# Altium PCB FT232RTPCB.PcbDoc
Units mm, origin at the board's own origin, x right, y up, seen from the top; angles counter-clockwise.
Board outline 26.04 x 16 mm, 2 copper layers (Top Layer, Bottom Layer); 11 components, 14 nets, 59 pads, 14 vias.
Unrouted connection lines stored in the file: 2.
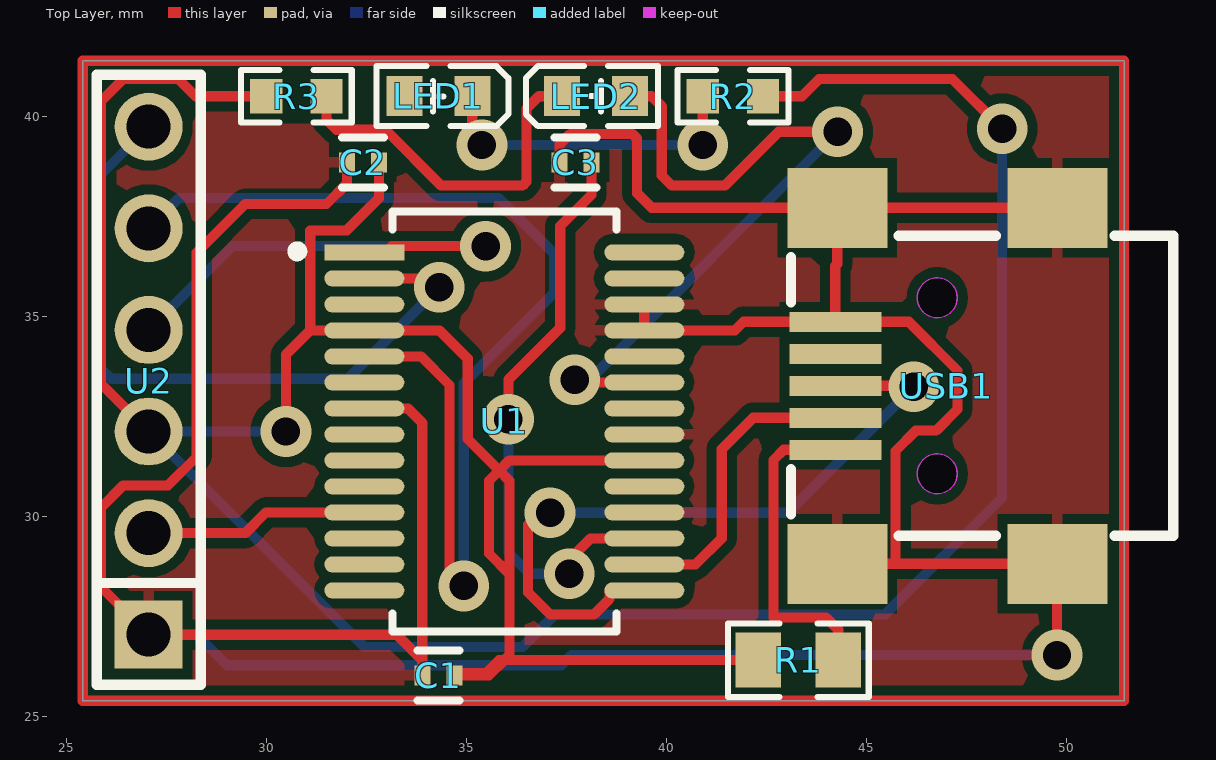
[diagram p0: Top Layer view]
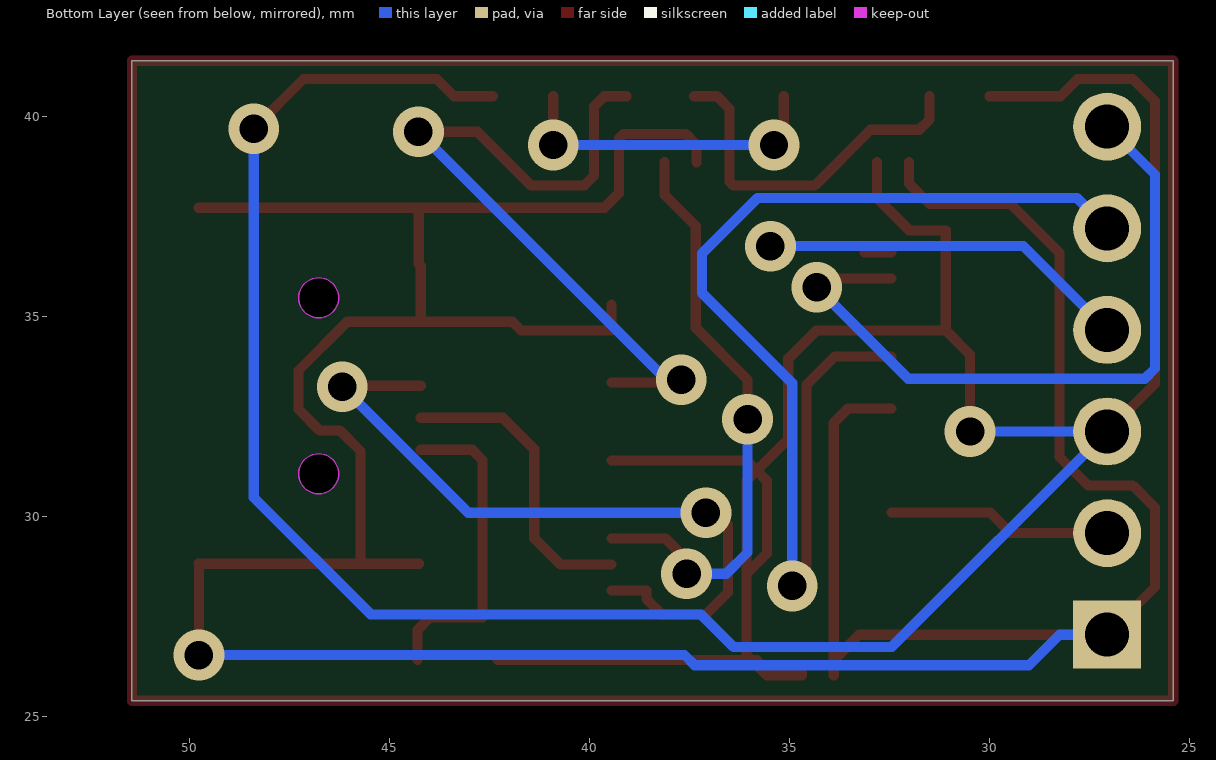
[diagram p1: Bottom Layer view, seen from below]

## Layer stack, top to bottom
Top Solder: solder mask 0.0102, Solder Resist, Dk 3.5
Top Layer: signal copper 0.0356
Dielectric 1: dielectric 0.32, FR-4, Dk 4.8
Bottom Layer: signal copper 0.0356
Bottom Solder: solder mask 0.0102, Solder Resist, Dk 3.5

## Board outline
25.4,25.4 25.4,41.402 51.435,41.402 51.435,25.4

## Design rules (kind name [scope] priority, off if disabled: settings)
Clearance [All] p1: gap=0.254 ignorepadtopadclearanceinfootprint=FALSE except(0.2: Arc-Arc Arc-Track Arc-SMDPad Arc-THPad Track-Track Track-SMDPad Track-THPad SMDPad-SMDPad SMDPad-THPad THPad-THPad)
PolygonConnect [All] p1: connectstyle=Relief reliefconductorwidth=0.254 reliefentries=4 polygonreliefangle="90 Angle" airgapwidth=0.254
RoutingVias [All] p1: holewidth=0.711 width=1.27 viastyle="Through Hole" minholewidth=0.711 minwidth=1.27 maxholewidth=0.711 maxwidth=1.27
SolderMaskExpansion [All] p1: expansion=0.102 istentingtop=FALSE
SupplyNets "Schematic Supply Nets" [InNet('GND')] p1: voltage=0.000
Width [All] p1: maxlimit=0.254 minlimit=0.254 preferedwidth=0.254
30 further rules are at their usual default settings.

## Components (designator, comment, footprint, x,y, rotation, side; value= is the part's Value field where it differs from the comment)
C1 "10uF" FP-GRM15-MFG 34.29,26.035 r0 top value=0.10μF
C2 "0.1uF" FP-GRM15-MFG 32.404,38.862 r0 top value=0.10μF
C3 "0.1uF" FP-GRM15-MFG 37.719,38.862 r0 top value=0.10μF
LED1 "YLED0603R" LED0603-FD 34.29,40.513 r0 top
LED2 "YLED0603R" LED0603-FD 38.227,40.513 r180 top
R1 "0kΩ" R0805 43.291,26.416 r0 top value=10kΩ
R2 "1kΩ" R0603 41.656,40.513 r0 top
R3 "1kΩ" R0603 30.743,40.513 r180 top
U1 "FT232RL-REEL" FP-SSOP-28-MFG 35.941,32.385 r0 top
U2 "HB-PH3-25416PB2GOP" HDR-TH_6P-P2.54-V-M 27.051,33.401 r90 top
USB1 "KH-MINI-SMT-5P-Cu" MINI-USB-SMD_KH-MINI-SMT-5P-CU 46.99,33.274 r90 top

## Footprints (in the part's own frame and the unit in brackets; to place one, negate y for a bottom-side part, rotate by r counter-clockwise, add the part's x,y. Pads: shape width x height; smd on the part's side, far side on the other; paste and mask are expansions set on the pad)
FP-GRM15-MFG [mm]
  rect 0.4x0.5 smd paste+0 mask+0: 1(-0.4,0) 2(0.4,0)
  silkscreen extent -0.53,-0.62 0.53,0.62, body extent -0.7,-0.38 0.7,0.38, height 0.25
FP-SSOP-28-MFG [mm]
  rect 2x0.4 smd paste+0 mask+0: 1(-3.5,4.225)
  rrect100% 2x0.4 smd paste+0 mask+0: 2(-3.5,3.575) 3(-3.5,2.925) 4(-3.5,2.275) 5(-3.5,1.625) 6(-3.5,0.975) 7(-3.5,0.325) 8(-3.5,-0.325) 9(-3.5,-0.975) 10(-3.5,-1.625) 11(-3.5,-2.275) 12(-3.5,-2.925) 13(-3.5,-3.575) 14(-3.5,-4.225) 15(3.5,-4.225) 16(3.5,-3.575) 17(3.5,-2.925) 18(3.5,-2.275) 19(3.5,-1.625) 20(3.5,-0.975) 21(3.5,-0.325) 22(3.5,0.325) 23(3.5,0.975) 24(3.5,1.625) 25(3.5,2.275) 26(3.5,2.925) 27(3.5,3.575) 28(3.5,4.225)
  silkscreen extent -5.3,-5.25 2.8,5.25, body extent -4.6,-5.55 4.6,5.55, height 0.25
HDR-TH_6P-P2.54-V-M [mm]
  rect 1.7x1.7 hole 1.1: 1(-6.35,0)
  round 1.7 hole 1.1: 2(-3.81,0) 3(-1.27,0) 4(1.27,0) 5(3.81,0) 6(6.35,0)
  silkscreen extent -7.6,-1.3 7.65,1.3
LED0603-FD [mm]
  rect 0.9x1 smd: 1(-0.85,0) 2(0.85,0)
  silkscreen extent -1.55,-0.75 1.75,0.75
MINI-USB-SMD_KH-MINI-SMT-5P-CU [mm]
  rect 0.5x2.3 smd paste+0 mask+0.05: 1(-1.6,2.775) 2(-0.8,2.775) 3(0,2.775) 4(0.8,2.775) 5(1.6,2.775)
  rect 2x2.5 smd paste+0 mask+0.05: 6(-4.45,-2.775) 7(-4.45,2.725) 8(4.45,-2.775) 9(4.45,2.725)
  Keep-Out Layer board cut-out: -1.7,0.225 -1.749,0.008 -1.888,-0.166 -2.089,-0.263 -2.311,-0.263 -2.512,-0.166 -2.65,0.008 -2.7,0.225 -2.7,0.225 -2.65,0.442 -2.512,0.616 -2.311,0.712 -2.089,0.712 -1.888,0.616 -1.749,0.442 -1.7,0.225
  Keep-Out Layer board cut-out: 2.7,0.225 2.65,0.008 2.512,-0.166 2.311,-0.263 2.089,-0.263 1.888,-0.166 1.749,0.008 1.7,0.225 1.7,0.225 1.749,0.442 1.888,0.616 2.089,0.712 2.311,0.712 2.512,0.616 2.65,0.442 2.7,0.225
  Keep-Out Layer circle w0.025: c-2.2,0.225 r0.5
  Keep-Out Layer circle w0.025: c2.2,0.225 r0.5
  Keep-Out Layer region: -1.7,0.225 -1.749,0.008 -1.888,-0.166 -2.089,-0.263 -2.311,-0.263 -2.512,-0.166 -2.65,0.008 -2.7,0.225 -2.7,0.225 -2.65,0.442 -2.512,0.616 -2.311,0.712 -2.089,0.712 -1.888,0.616 -1.749,0.442 -1.7,0.225
  Keep-Out Layer region: 2.7,0.225 2.65,0.008 2.512,-0.166 2.311,-0.263 2.089,-0.263 1.888,-0.166 1.749,0.008 1.7,0.225 1.7,0.225 1.749,0.442 1.888,0.616 2.089,0.712 2.311,0.712 2.512,0.616 2.65,0.442 2.7,0.225
  silkscreen extent -3.75,-5.67 3.75,3.89
R0603 [mm]
  rect 0.806x0.864 smd paste-100 mask+0.051: 1(-0.753,0) 2(0.753,0)
  silkscreen extent -1.39,-0.66 1.39,0.66
R0805 [mm]
  rect 1.133x1.377 smd paste-100 mask+0.051: 1(-1,0) 2(1,0)
  silkscreen extent -1.76,-0.92 1.76,0.92

## Part data
C1 C2 C3: library part CMP-2100-03641-2, "CAP CER 0.1UF 16V X7R 0402", Capacitance=0.10μF, Manufacturer=Murata, Manufacturer Part Number=GRM155R71C104KA88D, Package=GRM15, Temperature="-55°C to +125°C", Temperature Characteristic=X7R, Temperature Range High=+125°C, Temperature Range Low=-55°C, Tolerance=10%, Voltage Rating=16Vdc, Category=Cap, ComponentLink2Description=Datasheet, ComponentLink2URL=https://search.murata.co.jp/Ceramy/image/img/A01X/G101/ENG/GRM155R71H471KA01-01A.pdf, Device Class L1="Passive Components", Device Class L2=Capacitors, Device Class L3="Ceramic Capacitors", Digikey Description="CAP CER 0.1UF 16V X7R 0402", Height=0.55mm, Ipc Land Pattern Name=CAPC10050X219, Lead Free=yes, Material=Ceramic, Mouser Description="0402 0.1 uF 16V ±10 % Tolerance X7R SMT Multilayer Ceramic Capacitor", Octopart=https://octopart.com/grm155r71c104ka88d-murata-196880, RoHS=TRUE, Standoff Height=0mm
LED1 LED2: Color Temperature=-, Emitted Color=Red, Forward Current=25mA, Forward Voltage (VF)=1.8V~2.4V, JLCPCB Part Class="Extended Part", Manufacturer=YONGYUTAI(永裕泰), Operating Temperature=-40℃~+85℃, Add into BOM=yes, Convert to PCB=yes, Datasheet=https://atta.szlcsc.com/upload/public/pdf/source/20231027/FB19AF06E2C70028E58AB5CEDD1BDC72.pdf, Device=YLED0603R, Diode Configuration=-, Dominant Wavelength=620nm~625nm, LCSC Part Name=YLED0603R, Lens Color=-, Luminous Intensity=-, Manufacturer Part=YLED0603R, Mounting Sytle=-, Peak Wavelength=-, Power Dissipation=-, Supplier=LCSC, Supplier Footprint=0603, Supplier Part=C19171390, Symbol=YLED0603R, Viewing Angle=-
R1: library part RC0805FR-0710KL, JLCPCB Part Class="Extended Part", LCSC Part Name="厚膜电阻 10kΩ ±1% 125mW", Manufacturer=YAGEO(国巨), Operating Temperature Range=-55℃~+155℃, Temperature Coefficient=±100ppm/℃, Tolerance=±1%, Add into BOM=yes, Convert to PCB=yes, Datasheet=https://atta.szlcsc.com/upload/public/pdf/source/20170708/1499509500945.pdf, Device=RC0805FR-0710KL, Manufacturer Part=RC0805FR-0710KL, Supplier=LCSC, Supplier Footprint=0805, Supplier Part=C84376, Symbol=RC0805FR-0710KL, Type="Thick Film Resistors"
R2 R3: JLCPCB Part Class="Extended Part", Manufacturer=YAGEO(国巨), Manufacturer Part=RC0603FR-071KL, nameAlias=Value, spicePre=R, spiceSymbolName=RC0603FR-071KL, Supplier=LCSC, Supplier Part=C22548
U1: library part CMP-0078-00029-4, "IC USB FS SERIAL UART 28-SSOP", Case/Package=SSOP, Max Operating Temperature=85°C, Max Supply Voltage=5.25V, Min Operating Temperature=-40°C, Min Supply Voltage=3.3V, Operating Supply Current=15mA, Package Quantity=2000, Voltage=5V, Data Rate=12Mbps, Height=1.75mm, Interface=UART, Lead Free="Lead Free", Length=10.2mm, Mount="Surface Mount", Number of Channels=1, Number of Pins=28, Number of Transceivers=1, Packaging="Tape and Reel", Radiation Hardening=No, REACH SVHC="No SVHC", Weight=0.080001oz, Width=5.3mm
U2: Color=Black, Current Rating=3A, JLCPCB Part Class="Extended Part", LCSC Part Name="1x6P 间距:2.54mm 方针 直插", Manufacturer=HANBO(汉博), Operating Temperature=-40℃~+105℃, Voltage Rating (Max)=250V, Add into BOM=yes, Circluar Pins/Square Pins=Policy, Contact Material=Brass, Contact Plating=Gold, Convert to PCB=yes, Datasheet=https://atta.szlcsc.com/upload/public/pdf/source/20230803/F72D259687963761DF1B552F3BB84A31.pdf, Device=HB-PH3-25416PB2GOP, Insulation Height=2.54mm, Length of End Connection Pin=3mm, Length of Mating Pin=6mm, Manufacturer Part=HB-PH3-25416PB2GOP, Mounting Type=Straight, Number of Pins=6P, Number of Rows="Single Row", Pin Structure=1x6P, Pitch=2.54mm, Row Spacing=2.54mm, Supplier=LCSC, Supplier Footprint=插件,P=2.54mm, Supplier Part=C6332199, Symbol=HB-PH3-25416PB2GOP
USB1: Current Rating - Power (Max)=1A, JLCPCB Part Class="Extended Part", LCSC Part Name="Mini-B 母 卧贴", Manufacturer=kinghelm(金航标), Operating Temperature Range=-, Add into BOM=yes, Connector Type=Mini-B, Contact Material=-, Contact Plating=-, Convert to PCB=yes, Datasheet=https://atta.szlcsc.com/upload/public/pdf/source/20210202/C2688795_BF0BB16DAD2ABFC9845DEEA6AC1A1F9C.pdf, Device=KH-MINI-SMT-5P-Cu, Gender=Female, Manufacturer Part=KH-MINI-SMT-5P-Cu, Mounting Style=卧贴, Number of Contacts=5P, Number of Ports=1, Soldering Temperature(Max)=-, Standard="USB 2.0", Supplier=LCSC, Supplier Footprint=SMD, Supplier Part=C2688795, Symbol=KH-MINI-SMT-5P-CU

## Via types
v1: diameter 1.27, hole 0.711, Top Layer to Bottom Layer, 14 vias

## Nets (pads, with @x,y where several pads share a name; then routed paths per layer and width w, separated by ;. In a path a pad name is that pad's centre, name@x,y a point inside that pad or via, vN(x,y) a via of type N, cw(c..) or ccw(c..) an arc to the next point about the centre after c; other vN are vias at no path point)
GND: C1.1 C2.1 C3.1 U1.7 U1.18 U1.21 U1.25 U1.26 U2.1 USB1.5 USB1.6 USB1.7 USB1.8 USB1.9 | length 94.9
  Top Layer w0.254: C2.1 32.004,38.329 31.496,37.821 29.464,37.821 28.245,36.601 28.245,31.496 27.534,30.785 26.416,30.785 25.857,30.226 25.857,28.245 U2.1 33.255,27.051 33.89,26.416 ; U1.7 33.528,32.71 33.89,32.348 33.89,26.416 ; C1.1 33.89,26.416 ; C3.1 37.319,39.3 37.592,39.573 39.141,39.573 39.26,39.454 39.26,38.088 39.624,37.724 USB1.9 ; U1.26 U1.25 41.707,34.66 41.921,34.874 USB1.5 ; USB1.7 45.72,28.824 ; v1(49.759,26.543) USB1.6@49.759,28.824 ; USB1.6 USB1.6@49.759,28.824 ; USB1.8 USB1.9 ; USB1.5 46.05,34.874 47.269,33.655 47.269,32.687 46.736,32.153 46.228,32.153 45.72,31.645 45.72,28.824 ; USB1.5 44.215,36.271 44.265,36.321 USB1.9 ; 45.72,28.824 USB1.6@49.759,28.824
  Bottom Layer w0.254: U2.1 28.245,27.051 29.007,26.289 37.363,26.289 37.617,26.543 v1(49.759,26.543)
NetC1_2: C1.2 C2.2 R1.1 R2.2 R3.2 U1.4 U1.20 U2.3 | length 94
  Top Layer w0.254: U2.3 25.857,33.325 25.857,40.386 26.416,40.945 27.788,40.945 28.219,40.513 R3.2 ; v1(30.48,32.131) 30.48,34.05 31.09,34.66 ; C2.2 32.804,37.96 32.004,37.16 31.09,37.16 31.09,34.66 ; U1.20 36.068,31.41 35.814,31.156 ; R1.1 35.941,26.416 ; R2.2 43.383,40.513 43.815,40.945 47.142,40.945 v1(48.387,39.7) ; 31.09,34.66 U1.4 34.315,34.66 35.027,33.949 35.027,31.943 35.814,31.156 ; 35.814,31.156 35.56,30.902 35.56,29.083 36.068,28.575 ; 35.814,31.156 36.068,30.902 36.068,28.575 ; 35.941,26.416 35.814,26.416 35.484,26.086 34.69,26.086 C1.2 35.56,26.035 35.941,26.416 ; 35.941,26.416 36.068,26.543 36.068,28.575
  Bottom Layer w0.254: v1(30.48,32.131) U2.3 32.436,26.746 36.398,26.746 37.211,27.559 45.466,27.559 48.387,30.48 v1(48.387,39.7)
NetC3_2: C3.2 U1.17 | length 14.8
  Top Layer w0.254: v1(36.043,32.436) 36.043,33.426 37.338,34.722 37.338,37.268 38.119,38.049 C3.2 ; v1(37.567,28.575) 37.567,28.927 38.1,29.46 U1.17
  Bottom Layer w0.254: v1(36.043,32.436) 36.043,29.108 36.576,28.575 v1(37.567,28.575)
NetLED1_1: LED1.1 U1.22
NetLED1_2: LED1.2 R2.1 | length 8.1
  Top Layer w0.254: LED1.2 35.14,39.536 v1(35.382,39.294) ; v1(40.903,39.294) R2.1
  Bottom Layer w0.254: v1(35.382,39.294) v1(40.903,39.294)
NetLED2_1: LED2.1 U1.23 | length 18.6
  Top Layer w0.254: v1(37.699,33.426) 37.766,33.36 U1.23 ; LED2.1 39.624,40.513 39.878,40.259 39.878,38.532 40.132,38.278 41.453,38.278 42.799,39.624 v1(44.272,39.624)
  Bottom Layer w0.254: v1(37.699,33.426) 38.075,33.426 v1(44.272,39.624)
NetLED2_2: LED2.2 R3.1 | length 9.1
  Top Layer w0.254: R3.1 31.496,39.929 31.75,39.675 32.969,39.675 34.366,38.278 36.398,38.278 36.493,38.372 36.493,40.201 36.805,40.513 LED2.2
NetR1_2: R1.2 USB1.1 | length 8.1
  Top Layer w0.254: USB1.1 42.926,31.674 42.672,31.42 42.672,27.483 43.986,27.483 44.291,27.178 R1.2
NetU1_1: U1.1 U2.4 | length 12.5
  Top Layer w0.254: U1.1 33.122,36.61 33.122,36.765 v1(35.473,36.765)
  Bottom Layer w0.254: U2.4 29.145,36.765 v1(35.473,36.765)
NetU1_2: U1.2 U2.6 | length 18
  Top Layer w0.254: U1.2 34.093,35.96 v1(34.315,35.738)
  Bottom Layer w0.254: U2.6 25.857,38.557 25.857,33.706 26.111,33.452 32.029,33.452 v1(34.315,35.738)
NetU1_5: U1.5 U2.5 | length 27.9
  Top Layer w0.254: U1.5 33.858,34.01 34.573,33.296 34.573,28.623 v1(34.925,28.27)
  Bottom Layer w0.254: U2.5 27.813,37.973 35.789,37.973 37.186,36.576 37.186,35.601 34.925,33.34 v1(34.925,28.27)
NetU1_11: U1.11 U2.2 | length 5.6
  Top Layer w0.254: U2.2 29.464,29.591 29.983,30.11 U1.11
NetU1_15: U1.15 USB1.3 | length 18.2
  Top Layer w0.254: v1(37.084,30.099) 36.83,30.099 36.536,29.805 36.536,28.107 37.084,27.559 38.187,27.559 38.568,27.94 38.568,28.16 U1.15 ; USB1.3 46.152,33.274 v1(46.177,33.249)
  Bottom Layer w0.254: v1(37.084,30.099) 43.028,30.099 v1(46.177,33.249)
NetU1_16: U1.16 USB1.2 | length 7.6
  Top Layer w0.254: U1.16 40.723,28.81 41.377,29.464 41.377,31.686 42.164,32.474 USB1.2
pads on no net: U1.3 U1.6 U1.8 U1.9 U1.10 U1.12 U1.13 U1.14 U1.19 U1.24 U1.27 U1.28 USB1.4
copper on no net: | length 84.1
  Top Layer w0.254: 25.4,25.4 25.4,41.402 51.435,41.402 51.435,25.4 25.4,25.4

## Polygon pours and split planes (outlines as drawn)
GND on Top Layer "GND_L01_P001" (solid, pour order 1): 25.4,25.4 25.4,41.402 51.435,41.402 51.435,25.4